# EAGLE board corrector (EAGLE 6.6.0)
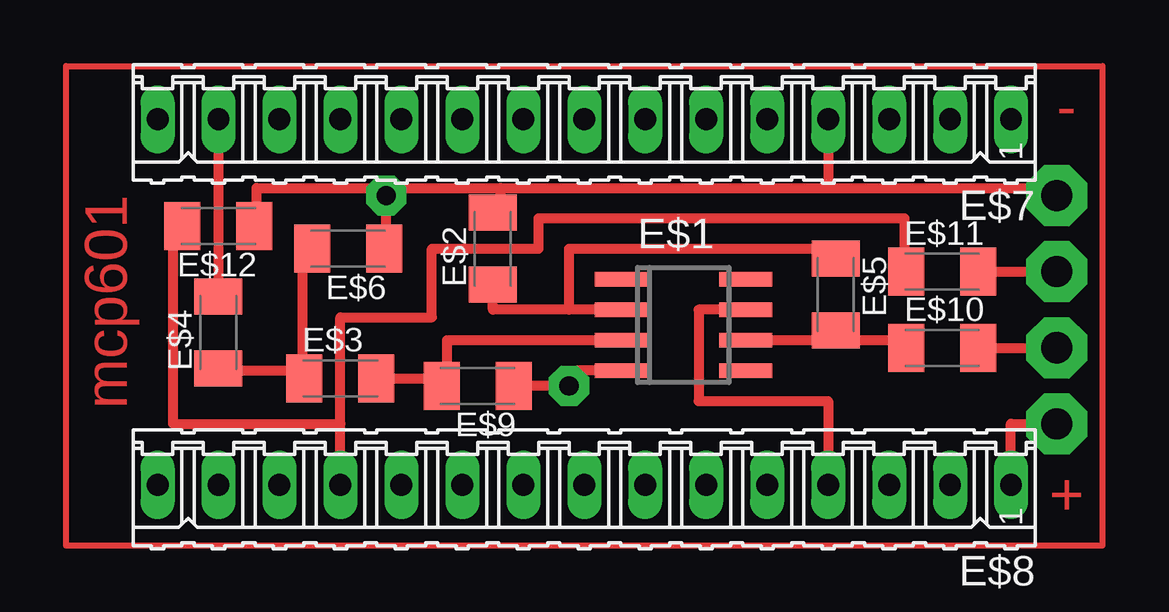
[diagram p0: board, top side]
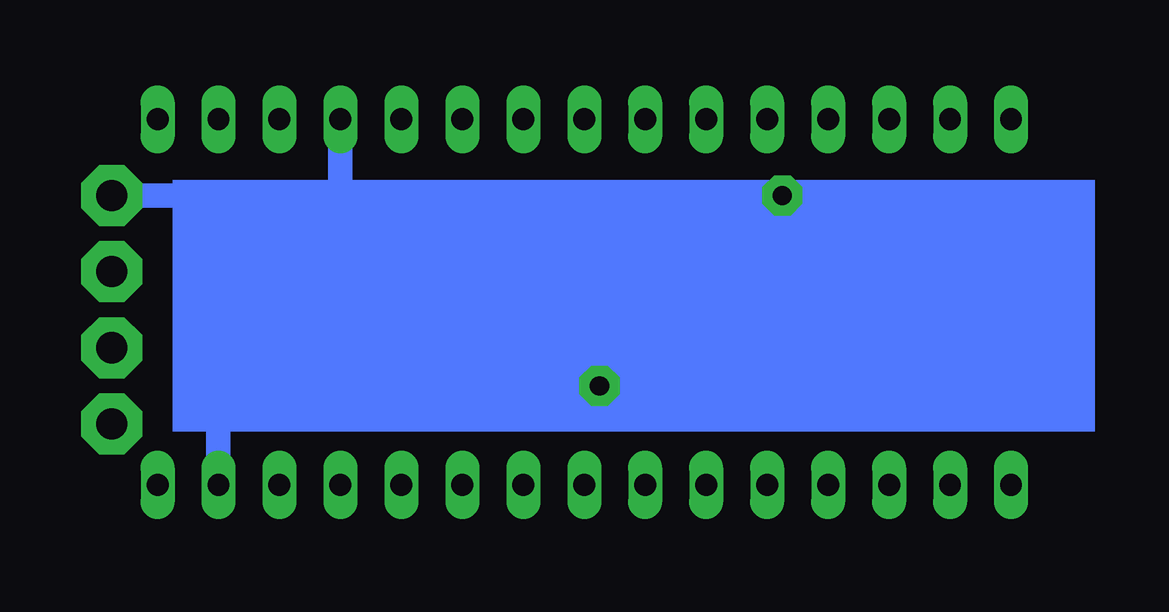
[diagram p1: board, bottom side, seen from below]

No outline drawn. Coordinates in mm, seen from the top.
Copper layers (1*16): Top 0.035mm / dielectric 1.5mm / Bottom 0.035mm
Design rules "default": minimum track width 10mil, minimum drill 24mil, track to track 8mil, track to pad 8mil, pad to pad 8mil, via to via 8mil, smd to smd 8mil, copper to edge 40mil, drill to drill 8mil, minimum pad ring 10mil, minimum via ring 8mil, stop-mask expansion 4mil, vias tented up to drill 0mil, thermal gap 10mil

## Footprints (pad centres in the part's own frame; a part is rotated, then mirrored left to right if it is on the bottom)
SO8 = smd 0.6 x 2.2: 1 -1.905,-2.6; 2 -0.635,-2.6; 3 0.635,-2.6; 4 1.905,-2.6; 5 1.905,2.6; 6 0.635,2.6; 7 -0.635,2.6; 8 -1.905,2.6
C1206K = smd 1.5 x 2: 1 -1.5,0; 2 1.5,0
15P = drill 0.914 long: 1 -17.78,0; 2 -15.24,0; 3 -12.7,0; 4 -10.16,0; 5 -7.62,0; 6 -5.08,0; 7 -2.54,0; 8 0,0; 9 2.54,0; 10 5.08,0; 11 7.62,0; 12 10.16,0; 13 12.7,0; 14 15.24,0; 15 17.78,0

## Placement (x,y rotation side)
E$1  [SO8]  25.72,9.21 270 top
E$2  [C1206K]  17.78,12.38 90 top
E$3  [C1206K]  11.43,6.99 0 top
E$4  [C1206K]  6.35,8.89 90 top
E$5  [C1206K]  32.07,10.48 270 top
E$6  [C1206K]  11.75,12.38 180 top
E$7  [15P]  21.59,17.78 180 top
E$8  [15P]  21.59,2.54 180 top
E$9  [C1206K]  17.14,6.67 180 top
E$10  [C1206K]  36.51,8.26 0 top
E$11  [C1206K]  36.51,11.43 0 top
E$12  [C1206K]  6.35,13.34 180 top

## Library data of the parts
E$1 = ref-packages-longpad
E$2-E$6 E$9-E$12 = resistor
E$7 E$8 = con-amp-quick

## Nets
S$2: E$7.14
S$3: E$7.4 E$8.2
S$5: E$8.1
S$10: E$8.4

## Tracks (layer width: path | path; a pad name or v marks a point on that pad's centre or on a via)
S$1
  Top 0.254: 0,0 0,20 43.18,20 43.18,0 0,0
S$2
  Top 0.406: E$7.14 6.35,10.16
S$3  (via drill 0.8 pad 1.68, 1.3 pad 2.54)
  Top 0.406: 7.94,13.34 7.94,14.92 13.34,14.92 | 13.34,12.38 v13.34,14.61 13.34,14.92 | E$7.4 31.75,14.92 | 31.75,14.92 40.96,14.92 | 13.34,14.92 18.1,14.92 | 18.1,14.92 31.75,14.92 | 18.1,14.92 18.1,13.65
  Bottom 1.016: E$7.4 31.75,14.61 v41.27,14.61 36.83,14.61 E$8.2
S$4
  Top 0.406: 23.81,9.84 20.95,9.84 | 20.95,9.84 17.78,9.84 17.78,10.79 | 20.95,9.84 20.95,12.38 32.38,12.38
S$5  (via drill 1.3 pad 2.54)
  Top 0.406: E$8.1 39.37,5.08 v41.27,5.08
S$6
  Top 0.406: 6.35,7.3 9.84,7.3 9.84,12.38
S$7  (via drill 0.8 pad 1.68)
  Top 0.406: 23.5,7.3 21.27,7.3 21.27,6.67 v20.95,6.67 19.37,6.67
S$8
  Top 0.406: 13.02,6.99 15.88,6.99 15.88,8.57 23.81,8.57
S$10
  Top 0.406: 28.57,9.84 26.35,9.84 26.35,6.03 31.75,6.03 E$8.4
S$11  (via drill 1.3 pad 2.54)
  Top 0.406: 37.78,11.43 v41.27,11.43
S$12  (via drill 1.3 pad 2.54)
  Top 0.406: 37.78,8.26 v41.27,8.26
S$13
  Top 0.406: 27.94,8.57 32.07,8.57 | 32.07,8.57 35.24,8.57 | 32.07,9.53 32.07,8.57
S$15
  Top 0.406: 4.76,13.34 4.45,13.34 4.45,5.08 11.43,5.08 | 11.43,2.22 11.43,5.08 | 11.43,5.08 11.43,9.53 15.24,9.53 15.24,12.38 19.68,12.38 19.68,13.65 34.92,13.65 34.92,11.43
(copper drawn outside any net)
  shapes: Bottom area x1

## Text on the board
Top: - | mcp601 | +